# Altium PCB ChronomePCBV2_2.PcbDoc (part 2 of 2)
Units mil, origin at the board's own origin, x right, y up, seen from the top; angles counter-clockwise.
Board outline 8860 x 8860 mil, 2 copper layers (Top Layer, Bottom Layer); 151 components, 169 nets, 789 pads, 304 vias.
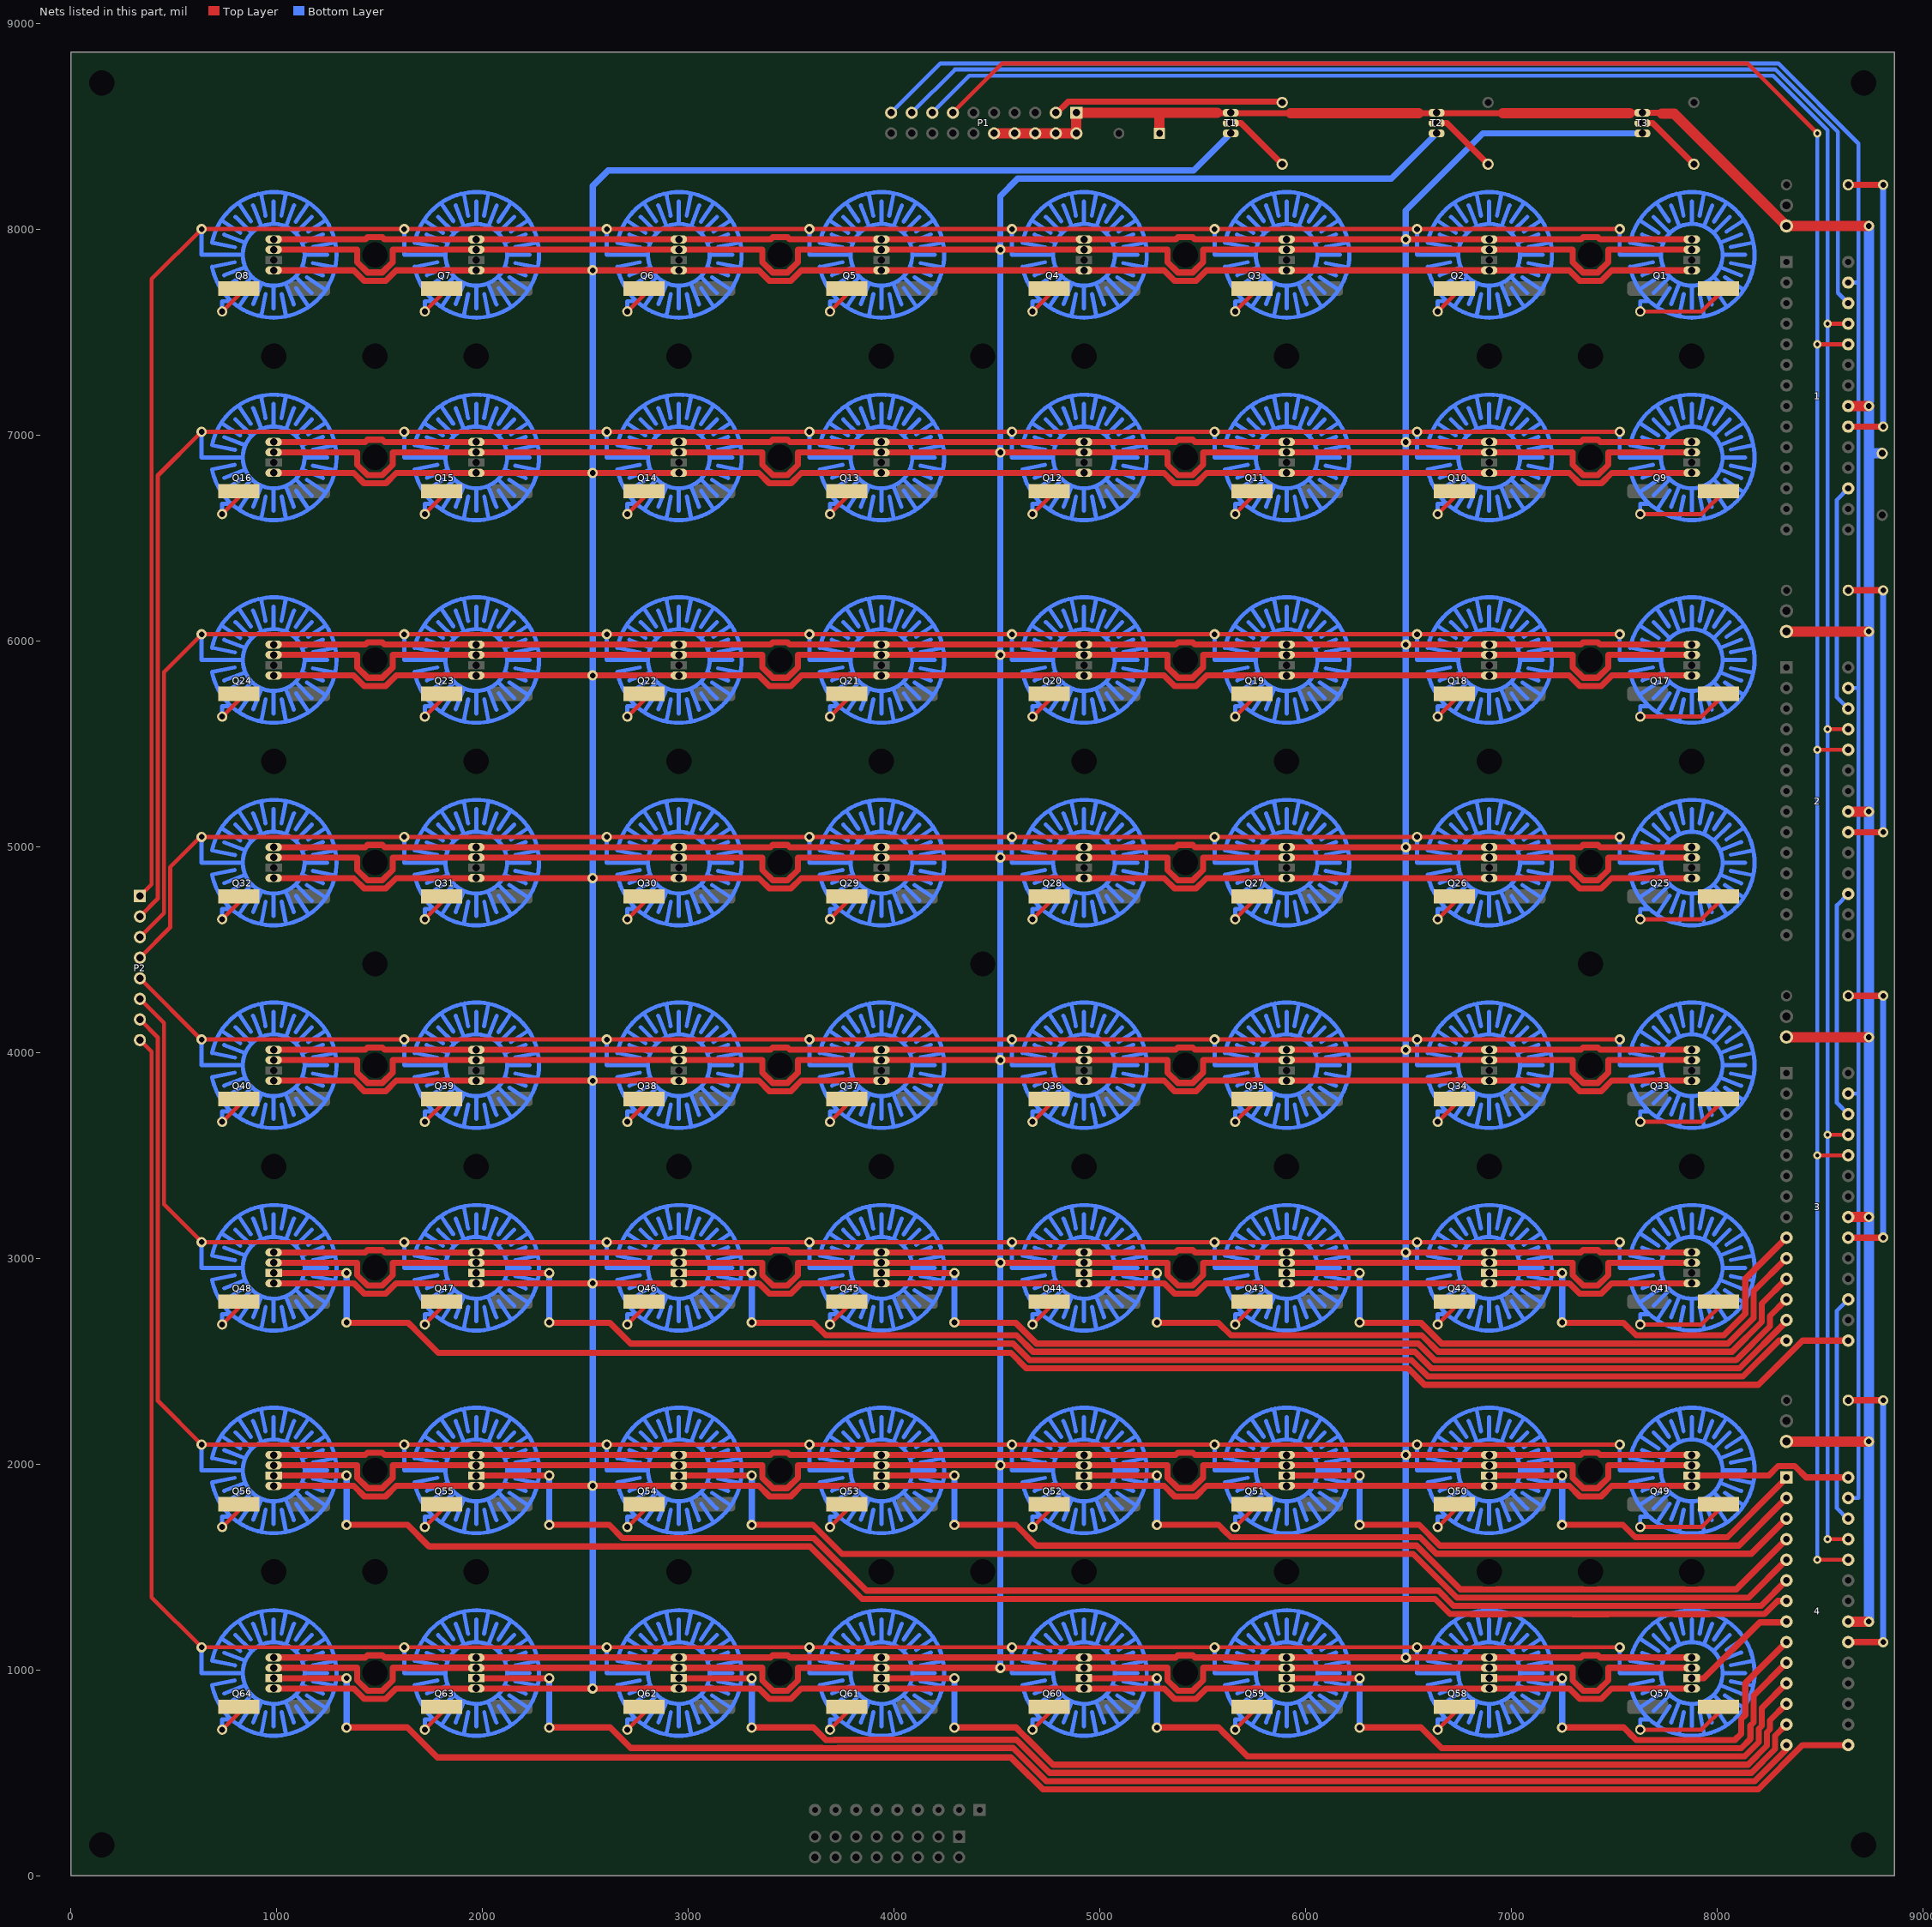
[diagram p2: the nets of this part, all layers, seen from the top]

## Via types
v1: diameter 50, hole 28, Top Layer to Bottom Layer, 284 vias
v2: diameter 40, hole 20, Top Layer to Bottom Layer, 20 vias

## Nets (pads, with @x,y where several pads share a name; then routed paths per layer and width w, separated by ;. In a path a pad name is that pad's centre, name@x,y a point inside that pad or via, vN(x,y) a via of type N, cw(c..) or ccw(c..) an arc to the next point about the centre after c; other vN are vias at no path point) (continued)
"LED GND 42": 3.9 Q42.1 | length 2005.3
  Top Layer w30: Q42.1@6890.63,2928.62 v1(7245.12,2928.62) ; v1@7245.12,2685.87 7543.93,2685.87 7604.17,2625.63 8030.63,2625.63 8135.12,2730.12 8135.12,2900.12 3.9@8335.12,3100.12
  Bottom Layer w30: v1(7245.12,2688.86) v1(7245.12,2928.62)
"LED GND 43": 3.10 Q43.1 | length 2957.9
  Top Layer w30: Q43.1@5906.38,2928.62 v1(6260.87,2928.62) ; v1@6260.87,2685.87 6559.68,2685.87 6659.92,2585.63 8050.63,2585.63 8175.12,2710.12 8175.12,2840.12 3.10@8335.12,3000.12
  Bottom Layer w30: v1(6260.87,2688.86) v1(6260.87,2928.62)
"LED GND 44": 3.11 Q44.1 | length 3910.4
  Top Layer w30: Q44.1@4922.13,2928.62 v1(5276.61,2928.62) ; v1@5276.61,2685.87 5575.43,2685.87 5635.67,2625.63 6563.35,2625.63 6643.35,2545.63 8070.63,2545.63 8215.12,2690.12 8215.12,2780.12 3.11@8335.12,2900.12
  Bottom Layer w30: v1(5276.61,2688.86) v1(5276.61,2928.62)
"LED GND 45": 3.12 Q45.1 | length 4862.9
  Top Layer w30: Q45.1@3937.87,2928.62 v1(4292.36,2928.62) ; v1@4292.36,2685.87 4591.18,2685.87 4691.42,2585.63 6546.78,2585.63 6626.78,2505.63 8090.63,2505.63 8255.12,2670.12 8255.12,2720.12 3.12@8335.12,2800.12
  Bottom Layer w30: v1(4292.36,2688.86) v1(4292.36,2928.62)
"LED GND 46": 3.13 Q46.1 | length 5813.5
  Top Layer w30: Q46.1@2953.62,2928.62 v1(3308.11,2928.62) ; v1@3308.11,2685.87 3606.93,2685.87 3667.16,2625.63 4594.85,2625.63 4674.85,2545.63 6530.21,2545.63 6610.21,2465.63 8107.2,2465.63 8335.12,2693.55 3.13@8335.12,2700.12
  Bottom Layer w30: v1(3308.11,2688.86) v1(3308.11,2928.62)
"LED GND 47": 3.14 Q47.1 | length 6785.6
  Top Layer w30: Q47.1@1969.37,2928.62 v1(2323.86,2928.62) ; v1@2323.86,2685.87 2619.37,2685.87 2719.61,2585.63 4578.28,2585.63 4658.28,2505.63 6513.65,2505.63 6593.65,2425.63 8123.77,2425.63 8298.26,2600.12 3.14@8335.12,2600.12
  Bottom Layer w30: v1(2323.86,2688.86) v1(2323.86,2928.62)
"LED GND 48": 3.15 Q48.1 | length 8102.6
  Top Layer w30: Q48.1@985.12,2928.62 v1(1339.61,2928.62) ; v1@1339.61,2685.87 1639.37,2685.87 1669.37,2655.87 ; 1669.37,2654.92 1784.17,2540.12 4567.22,2540.12 4641.71,2465.63 6497.08,2465.63 6577.08,2385.63 8198.41,2385.63 8412.9,2600.12 3.15@8635.12,2600.12
  Bottom Layer w30: v1(1339.61,2688.86) v1(1339.61,2928.62)
"LED GND 49": 4.28 Q49.1 | length 801.8
  Top Layer w30: Q49.1@7874.88,1944.88 8249.53,1944.88 8294.76,1990.12 8375.47,1990.12 8430.47,1935.12 4.28@8635.12,1935.12
"LED GND 50": 4.1 Q50.1 | length 1828.9
  Top Layer w30: Q50.1@6890.63,1944.37 v1(7245.12,1944.37) ; v1@7245.12,1705.12 7540.12,1705.12 7600.87,1644.37 8047.99,1644.37 8173.88,1770.27 8173.88,1770.78 4.1@8335.12,1932.01
  Bottom Layer w30: v1(7245.12,1704.61) v1(7245.12,1944.37)
"LED GND 51": 4.2 Q51.1 | length 2805.8
  Top Layer w30: Q51.1@5906.38,1944.37 v1(6260.87,1944.37) ; v1@6260.87,1705.12 6550.12,1705.12 6650.87,1604.37 8104.37,1604.37 4.2@8335.12,1835.12
  Bottom Layer w30: v1(6260.87,1704.61) v1(6260.87,1944.37)
"LED GND 52": 4.3 Q52.1 | length 3782.1
  Top Layer w30: Q52.1@4922.13,1944.37 v1(5276.61,1944.37) ; v1@5276.61,1705.12 5575.43,1705.12 5606.38,1674.17 5606.38,1673.66 5635.67,1644.37 6554.3,1644.37 6634.3,1564.37 8164.37,1564.37 4.3@8335.12,1735.12
  Bottom Layer w30: v1(5276.61,1704.61) v1(5276.61,1944.37)
"LED GND 53": 4.4 Q53.1 | length 4868.8
  Top Layer w30: Q53.1@3937.87,1944.37 v1(4292.36,1944.37) ; v1@4292.36,1705.12 4590.12,1705.12 4690.87,1604.37 6537.73,1604.37 6750.49,1391.61 6854.49,1391.61 6855,1391.09 6926.26,1391.09 6926.77,1391.61 7346.74,1391.61 7347.12,1391.22 7418.39,1391.22 7418.77,1391.61 7838.86,1391.61 7839.25,1391.22 7910.51,1391.22 7910.9,1391.61 8091.61,1391.61 4.4@8335.12,1635.12
  Bottom Layer w30: v1(4292.36,1704.61) v1(4292.36,1944.37)
"LED GND 54": 4.5 Q54.1 | length 5844.8
  Top Layer w30: Q54.1@2953.62,1944.37 v1(3308.11,1944.37) ; v1@3308.11,1705.12 3605.12,1705.12 3746.46,1563.78 6521.75,1563.78 6733.92,1351.61 6837.92,1351.61 6838.43,1351.09 6942.83,1351.09 6943.34,1351.61 7330.17,1351.61 7330.56,1351.22 7434.96,1351.22 7435.34,1351.61 7822.3,1351.61 7822.68,1351.22 7927.08,1351.22 7927.47,1351.61 8151.61,1351.61 4.5@8335.12,1535.12
  Bottom Layer w30: v1(3308.11,1704.61) v1(3308.11,1944.37)
"LED GND 55": 4.6 Q55.1 | length 6820.7
  Top Layer w30: Q55.1@1969.37,1944.37 v1(2323.86,1944.37) ; v1@2323.86,1705.12 2615.12,1705.12 2680.12,1640.12 3610.12,1640.12 3865.12,1385.12 6643.84,1385.12 6717.36,1311.61 6821.35,1311.61 6821.86,1311.09 6959.4,1311.09 6959.91,1311.61 7313.6,1311.61 7313.99,1311.22 7451.53,1311.22 7451.91,1311.61 7805.73,1311.61 7806.11,1311.22 7943.65,1311.22 7944.04,1311.61 8211.61,1311.61 4.6@8335.12,1435.12
  Bottom Layer w30: v1(2323.86,1704.61) v1(2323.86,1944.37)
"LED GND 56": 4.7 Q56.1 | length 7796.7
  Top Layer w30: Q56.1@985.12,1944.37 v1(1339.61,1944.37) ; v1@1339.61,1705.12 1635.12,1705.12 1740.12,1600.12 3590.12,1600.12 3845.12,1345.12 6627.28,1345.12 6700.79,1271.61 6708.63,1271.61 6804.78,1271.61 6805.29,1271.09 6975.97,1271.09 6976.48,1271.61 7297.03,1271.61 7297.42,1271.22 7468.09,1271.22 7468.48,1271.61 7789.16,1271.61 7789.54,1271.22 7960.22,1271.22 7960.61,1271.61 8228.17,1271.61 8291.69,1335.12 4.7@8335.12,1335.12
  Bottom Layer w30: v1(1339.61,1704.61) v1(1339.61,1944.37)
"LED GND 57": 4.8 Q57.1 | length 569.2
  Top Layer w30: Q57.1@7874.88,960.12 7934.37,960.12 8205.86,1231.61 4.8@8331.61,1231.61
"LED GND 58": 4.9 Q58.1 | length 2038.5
  Top Layer w30: Q58.1@6890.63,960.12 v1(7245.12,960.12) ; v1@7245.12,720.87 7544.37,720.87 7574.88,690.35 7574.88,689.41 7604.17,660.12 8085.12,660.12 8115.12,690.12 8115.12,761.76 8135.12,781.76 8135.12,935.12 4.9@8335.12,1135.12
  Bottom Layer w30: v1(7245.12,720.35) v1(7245.12,960.12)
"LED GND 59": 4.10 Q59.1 | length 2996.3
  Top Layer w30: Q59.1@5906.38,960.12 v1(6260.87,960.12) ; v1@6260.87,720.87 6559.17,720.87 6659.92,620.12 8115.06,620.12 8160.12,665.18 8160.12,729.82 8175.12,744.82 8175.12,875.12 4.10@8335.12,1035.12
  Bottom Layer w30: v1(6260.87,720.35) v1(6260.87,960.12)
"LED GND 60": 4.11 Q60.1 | length 3947.2
  Top Layer w30: Q60.1@4922.13,960.12 v1(5276.61,960.12) ; v1@5276.61,720.87 5575.43,720.87 5606.38,689.92 5606.38,689.41 5635.67,660.12 5636.18,660.12 5716.18,580.12 8131.63,580.12 8200.12,648.61 8200.12,713.25 8215.12,728.25 8215.12,815.12 4.11@8335.12,935.12
  Bottom Layer w30: v1(5276.61,720.35) v1(5276.61,960.12)
"LED GND 61": 4.12 Q61.1 | length 4897.7
  Top Layer w30: Q61.1@3937.87,960.12 v1(4292.36,960.12) ; v1@4292.36,720.87 4591.18,720.87 4622.13,689.92 4622.13,689.41 4651.42,660.12 4651.93,660.12 4771.93,540.12 8148.19,540.12 8240.12,632.04 8240.12,696.69 8255.12,711.69 8255.12,755.12 4.12@8335.12,835.12
  Bottom Layer w30: v1(4292.36,720.35) v1(4292.36,960.12)
"LED GND 62": 4.13 Q62.1 | length 5848.6
  Top Layer w30: Q62.1@2953.62,960.12 v1(3308.11,960.12) ; v1@3308.11,720.87 3606.93,720.87 3637.87,689.92 3637.87,689.41 3667.16,660.12 3708.58,660.12 3709.1,660.63 4594.33,660.63 4634.85,620.12 4635.36,620.12 4755.36,500.12 8164.76,500.12 8280.12,615.47 8280.12,680.12 4.13@8335.12,735.12
  Bottom Layer w30: v1(3308.11,720.35) v1(3308.11,960.12)
"LED GND 63": 4.14 Q63.1 | length 6798.9
  Top Layer w30: Q63.1@1969.37,960.12 v1(2323.86,960.12) ; v1@2323.86,720.87 2619.37,720.87 2719.61,620.63 3650.08,620.63 3650.59,620.12 3725.15,620.12 3725.66,620.63 4577.77,620.63 4618.28,580.12 4618.79,580.12 4738.79,460.12 8181.33,460.12 8333.88,612.67 8333.88,615.74 8335.12,616.98 4.14@8335.12,635.12
  Bottom Layer w30: v1(2323.86,720.35) v1(2323.86,960.12)
"LED GND 64": 4.15 Q64.1 | length 8103.4
  Top Layer w30: Q64.1@985.12,960.12 v1(1339.61,960.12) ; v1@1339.61,720.87 1395.12,720.87 1634.37,720.87 1780.12,575.12 4566.71,575.12 4601.71,540.12 4602.22,540.12 4722.22,420.12 8197.9,420.12 8412.9,635.12 4.15@8635.12,635.12
  Bottom Layer w30: v1(1339.61,720.35) v1(1339.61,960.12)
Net1_17: 1.17 2.26 | length 1115.6
  Bottom Layer w20: 2.26@8635.12,5670.12 8580.12,5725.12 8580.12,6685.12 1.17@8635.12,6740.12
Net1_20: 1.20 R4.1 | length 1515
  Top Layer w30: 1.20@8635.12,7040.12 v1(8805.12,7040.12) ; R4.1@8635.12,8215.12 v1(8805.12,8215.12)
  Bottom Layer w30: v1(8805.12,7040.12) v1(8805.12,8215.12)
Net2_17: 2.17 3.26 | length 1115.6
  Bottom Layer w20: 3.26@8635.12,3700.12 8580.12,3755.12 8580.12,4715.12 2.17@8635.12,4770.12
Net2_20: 2.20 R5.1 | length 1515
  Top Layer w30: 2.20@8635.12,5070.12 v1(8805.12,5070.12) ; R5.1@8635.12,6245.12 v1(8805.12,6245.12)
  Bottom Layer w30: v1(8805.12,5070.12) v1(8805.12,6245.12)
Net3_17: 3.17 4.26 | length 1115.6
  Bottom Layer w20: 4.26@8635.12,1730.12 8580.12,1785.12 8580.12,2745.12 3.17@8635.12,2800.12
Net3_20: 3.20 R6.1 | length 1515
  Top Layer w30: 3.20@8635.12,3100.12 v1(8805.12,3100.12) ; R6.1@8635.12,4275.12 v1(8805.12,4275.12)
  Bottom Layer w30: v1(8805.12,3100.12) v1(8805.12,4275.12)
Net4_20: 4.20 R7.1 | length 1515
  Top Layer w30: 4.20@8635.12,1135.12 v1(8805.12,1135.12) ; R7.1@8635.12,2310.12 v1(8805.12,2310.12)
  Bottom Layer w30: v1(8805.12,1135.12) v1(8805.12,2310.12)
NetD1_0: D1.0 Q1.Out | length 455.2
  Top Layer w20: Q1.Out@7624.88,7599.88 7923.12,7599.88 D1.0@8034.12,7710.88
NetD2_0: D2.0 Q2.Out | length 144.6
  Top Layer w20: Q2.Out@6640.63,7599.88 6721.63,7680.88 D2.0@6721.63,7710.88
NetD3_0: D3.0 Q3.Out | length 144.6
  Top Layer w20: Q3.Out@5656.38,7599.88 5737.38,7680.88 D3.0@5737.38,7710.88
NetD4_0: D4.0 Q4.Out | length 144.6
  Top Layer w20: Q4.Out@4672.13,7599.88 4753.13,7680.88 D4.0@4753.13,7710.88
NetD5_0: D5.0 Q5.Out | length 144.6
  Top Layer w20: Q5.Out@3687.87,7599.88 3768.87,7680.88 D5.0@3768.87,7710.88
NetD6_0: D6.0 Q6.Out | length 144.6
  Top Layer w20: Q6.Out@2703.62,7599.88 2784.62,7680.88 D6.0@2784.62,7710.88
NetD7_0: D7.0 Q7.Out | length 144.6
  Top Layer w20: Q7.Out@1719.37,7599.88 1800.37,7680.88 D7.0@1800.37,7710.88
NetD8_0: D8.0 Q8.Out | length 144.6
  Top Layer w20: Q8.Out@735.12,7599.88 816.12,7680.88 D8.0@816.12,7710.88
NetD9_0: D9.0 Q9.Out | length 455.2
  Top Layer w20: Q9.Out@7624.88,6615.63 7923.12,6615.63 D9.0@8034.12,6726.63
NetD10_0: D10.0 Q10.Out | length 144.6
  Top Layer w20: Q10.Out@6640.63,6615.63 6721.63,6696.63 D10.0@6721.63,6726.63
NetD11_0: D11.0 Q11.Out | length 144.6
  Top Layer w20: Q11.Out@5656.38,6615.63 5737.38,6696.63 D11.0@5737.38,6726.63
NetD12_0: D12.0 Q12.Out | length 144.6
  Top Layer w20: Q12.Out@4672.13,6615.63 4753.13,6696.63 D12.0@4753.13,6726.63
NetD13_0: D13.0 Q13.Out | length 144.6
  Top Layer w20: Q13.Out@3687.87,6615.63 3768.87,6696.63 D13.0@3768.87,6726.63
NetD14_0: D14.0 Q14.Out | length 144.6
  Top Layer w20: Q14.Out@2703.62,6615.63 2784.62,6696.63 D14.0@2784.62,6726.63
NetD15_0: D15.0 Q15.Out | length 144.6
  Top Layer w20: Q15.Out@1719.37,6615.63 1800.37,6696.63 D15.0@1800.37,6726.63
NetD16_0: D16.0 Q16.Out | length 144.6
  Top Layer w20: Q16.Out@735.12,6615.63 816.12,6696.63 D16.0@816.12,6726.63
NetD17_0: D17.0 Q17.Out | length 455.2
  Top Layer w20: Q17.Out@7624.88,5631.38 7923.12,5631.38 D17.0@8034.12,5742.38
NetD18_0: D18.0 Q18.Out | length 144.6
  Top Layer w20: Q18.Out@6640.63,5631.38 6721.63,5712.38 D18.0@6721.63,5742.38
NetD19_0: D19.0 Q19.Out | length 144.6
  Top Layer w20: Q19.Out@5656.38,5631.38 5737.38,5712.38 D19.0@5737.38,5742.38
NetD20_0: D20.0 Q20.Out | length 144.6
  Top Layer w20: Q20.Out@4672.13,5631.38 4753.13,5712.38 D20.0@4753.13,5742.38
NetD21_0: D21.0 Q21.Out | length 144.6
  Top Layer w20: Q21.Out@3687.87,5631.38 3768.87,5712.38 D21.0@3768.87,5742.38
NetD22_0: D22.0 Q22.Out | length 144.6
  Top Layer w20: Q22.Out@2703.62,5631.38 2784.62,5712.38 D22.0@2784.62,5742.38
NetD23_0: D23.0 Q23.Out | length 144.6
  Top Layer w20: Q23.Out@1719.37,5631.38 1800.37,5712.38 D23.0@1800.37,5742.38
NetD24_0: D24.0 Q24.Out | length 144.6
  Top Layer w20: Q24.Out@735.12,5631.38 816.12,5712.38 D24.0@816.12,5742.38
NetD25_0: D25.0 Q25.Out | length 455.2
  Top Layer w20: Q25.Out@7624.88,4647.13 7923.12,4647.13 D25.0@8034.12,4758.13
NetD26_0: D26.0 Q26.Out | length 144.6
  Top Layer w20: Q26.Out@6640.63,4647.13 6721.63,4728.13 D26.0@6721.63,4758.13
NetD27_0: D27.0 Q27.Out | length 144.6
  Top Layer w20: Q27.Out@5656.38,4647.13 5737.38,4728.13 D27.0@5737.38,4758.13
NetD28_0: D28.0 Q28.Out | length 144.6
  Top Layer w20: Q28.Out@4672.13,4647.13 4753.13,4728.13 D28.0@4753.13,4758.13
NetD29_0: D29.0 Q29.Out | length 144.6
  Top Layer w20: Q29.Out@3687.87,4647.13 3768.87,4728.13 D29.0@3768.87,4758.13
NetD30_0: D30.0 Q30.Out | length 144.6
  Top Layer w20: Q30.Out@2703.62,4647.13 2784.62,4728.13 D30.0@2784.62,4758.13
NetD31_0: D31.0 Q31.Out | length 144.6
  Top Layer w20: Q31.Out@1719.37,4647.13 1800.37,4728.13 D31.0@1800.37,4758.13
NetD32_0: D32.0 Q32.Out | length 144.6
  Top Layer w20: Q32.Out@735.12,4647.13 816.12,4728.13 D32.0@816.12,4758.13
NetD33_0: D33.0 Q33.Out | length 455.2
  Top Layer w20: Q33.Out@7624.88,3662.87 7923.12,3662.87 D33.0@8034.12,3773.87
NetD34_0: D34.0 Q34.Out | length 144.6
  Top Layer w20: Q34.Out@6640.63,3662.87 6721.63,3743.87 D34.0@6721.63,3773.87
NetD35_0: D35.0 Q35.Out | length 144.6
  Top Layer w20: Q35.Out@5656.38,3662.87 5737.38,3743.87 D35.0@5737.38,3773.87
NetD36_0: D36.0 Q36.Out | length 144.6
  Top Layer w20: Q36.Out@4672.13,3662.87 4753.13,3743.87 D36.0@4753.13,3773.87
NetD37_0: D37.0 Q37.Out | length 144.6
  Top Layer w20: Q37.Out@3687.87,3662.87 3768.87,3743.87 D37.0@3768.87,3773.87
NetD38_0: D38.0 Q38.Out | length 144.6
  Top Layer w20: Q38.Out@2703.62,3662.87 2784.62,3743.87 D38.0@2784.62,3773.87
NetD39_0: D39.0 Q39.Out | length 144.6
  Top Layer w20: Q39.Out@1719.37,3662.87 1800.37,3743.87 D39.0@1800.37,3773.87
NetD40_0: D40.0 Q40.Out | length 144.6
  Top Layer w20: Q40.Out@735.12,3662.87 816.12,3743.87 D40.0@816.12,3773.87
NetD41_0: D41.0 Q41.Out | length 455.2
  Top Layer w20: Q41.Out@7624.88,2678.62 7923.12,2678.62 D41.0@8034.12,2789.62
NetD42_0: D42.0 Q42.Out | length 144.6
  Top Layer w20: Q42.Out@6640.63,2678.62 6721.63,2759.62 D42.0@6721.63,2789.62
NetD43_0: D43.0 Q43.Out | length 144.6
  Top Layer w20: Q43.Out@5656.38,2678.62 5737.38,2759.62 D43.0@5737.38,2789.62
NetD44_0: D44.0 Q44.Out | length 144.6
  Top Layer w20: Q44.Out@4672.13,2678.62 4753.13,2759.62 D44.0@4753.13,2789.62
NetD45_0: D45.0 Q45.Out | length 144.6
  Top Layer w20: Q45.Out@3687.87,2678.62 3768.87,2759.62 D45.0@3768.87,2789.62
NetD46_0: D46.0 Q46.Out | length 144.6
  Top Layer w20: Q46.Out@2703.62,2678.62 2784.62,2759.62 D46.0@2784.62,2789.62
NetD47_0: D47.0 Q47.Out | length 144.6
  Top Layer w20: Q47.Out@1719.37,2678.62 1800.37,2759.62 D47.0@1800.37,2789.62
NetD48_0: D48.0 Q48.Out | length 144.6
  Top Layer w20: Q48.Out@735.12,2678.62 816.12,2759.62 D48.0@816.12,2789.62
NetD49_0: D49.0 Q49.Out | length 455.2
  Top Layer w20: Q49.Out@7624.88,1694.37 7923.12,1694.37 D49.0@8034.12,1805.37
NetD50_0: D50.0 Q50.Out | length 144.6
  Top Layer w20: Q50.Out@6640.63,1694.37 6721.63,1775.37 D50.0@6721.63,1805.37
NetD51_0: D51.0 Q51.Out | length 144.6
  Top Layer w20: Q51.Out@5656.38,1694.37 5737.38,1775.37 D51.0@5737.38,1805.37
NetD52_0: D52.0 Q52.Out | length 144.6
  Top Layer w20: Q52.Out@4672.13,1694.37 4753.13,1775.37 D52.0@4753.13,1805.37
NetD53_0: D53.0 Q53.Out | length 144.6
  Top Layer w20: Q53.Out@3687.87,1694.37 3768.87,1775.37 D53.0@3768.87,1805.37
NetD54_0: D54.0 Q54.Out | length 144.6
  Top Layer w20: Q54.Out@2703.62,1694.37 2784.62,1775.37 D54.0@2784.62,1805.37
NetD55_0: D55.0 Q55.Out | length 144.6
  Top Layer w20: Q55.Out@1719.37,1694.37 1800.37,1775.37 D55.0@1800.37,1805.37
NetD56_0: D56.0 Q56.Out | length 144.6
  Top Layer w20: Q56.Out@735.12,1694.37 816.12,1775.37 D56.0@816.12,1805.37
NetD57_0: pad.0@8004.12,821.12 Q57.Out | length 455.2
  Top Layer w20: Q57.Out@7624.88,710.12 7923.12,710.12 pad.0@8034.12,821.12
NetD58_0: D58.0 Q58.Out | length 144.6
  Top Layer w20: Q58.Out@6640.63,710.12 6721.63,791.12 D58.0@6721.63,821.12
NetD59_0: D59.0 Q59.Out | length 144.6
  Top Layer w20: Q59.Out@5656.38,710.12 5737.38,791.12 D59.0@5737.38,821.12
NetD60_0: D60.0 Q60.Out | length 144.6
  Top Layer w20: Q60.Out@4672.13,710.12 4753.13,791.12 D60.0@4753.13,821.12
NetD61_0: D61.0 Q61.Out | length 144.6
  Top Layer w20: Q61.Out@3687.87,710.12 3768.87,791.12 D61.0@3768.87,821.12
NetD62_0: D62.0 Q62.Out | length 144.6
  Top Layer w20: Q62.Out@2703.62,710.12 2784.62,791.12 D62.0@2784.62,821.12
NetD63_0: D63.0 Q63.Out | length 144.6
  Top Layer w20: Q63.Out@1719.37,710.12 1800.37,791.12 D63.0@1800.37,821.12
NetD64_0: D64.0 Q64.Out | length 144.6
  Top Layer w20: Q64.Out@735.12,710.12 816.12,791.12 D64.0@816.12,821.12
NetP2_1: P2.1 Q1.In Q2.In Q3.In Q4.In Q5.In Q6.In Q7.In Q8.In | length 10253.8
  Top Layer w20: P2.1@335.12,4760.12 392.12,4817.12 392.12,7756.88 v1(635.12,7999.88) v1(1619.37,7999.88) v1(2603.62,7999.88) v1(3587.87,7999.88) v1(4572.13,7999.88) v1(5556.38,7999.88) v1(6540.63,7999.88) v1(7524.88,7999.88)
NetP2_2: P2.2 Q9.In Q10.In Q11.In Q12.In Q13.In Q14.In Q15.In Q16.In | length 9369.5
  Top Layer w20: P2.2@335.12,4660.12 422.12,4747.12 422.12,6802.63 v1(635.12,7015.63) v1(1619.37,7015.63) v1(2603.62,7015.63) v1(3587.87,7015.63) v1(4572.13,7015.63) v1(5556.38,7015.63) v1(6540.63,7015.63) v1(7524.88,7015.63)
NetP2_3: P2.3 Q17.In Q18.In Q19.In Q20.In Q21.In Q22.In Q23.In Q24.In | length 8485.3
  Top Layer w20: P2.3@335.12,4560.12 452.12,4677.12 452.12,5848.38 v1(635.12,6031.38) v1(1619.37,6031.38) v1(2603.62,6031.38) v1(3587.87,6031.38) v1(4572.13,6031.38) v1(5556.38,6031.38) v1(6540.63,6031.38) v1(7524.88,6031.38)
NetP2_4: P2.4 Q25.In Q26.In Q27.In Q28.In Q29.In Q30.In Q31.In Q32.In | length 7604.5
  Top Layer w20: P2.4@335.12,4460.12 482.12,4607.12 482.12,4900.12 629.13,5047.13 v1(1619.37,5047.13) v1(2603.62,5047.13) v1(3587.87,5047.13) v1(4572.13,5047.13) v1(5556.38,5047.13) v1(6540.63,5047.13) v1(7524.88,5047.13)
  other v1: 635.12,5047.13
NetP2_5: P2.5 Q33.In Q34.In Q35.In Q36.In Q37.In Q38.In Q39.In Q40.In | length 7312.9
  Top Layer w20: P2.5@335.12,4360.12 632.36,4062.87 v1(1619.37,4062.87) v1(2603.62,4062.87) v1(3587.87,4062.87) v1(4572.13,4062.87) v1(5556.38,4062.87) v1(6540.63,4062.87) v1(7524.88,4062.87)
  other v1: 635.12,4062.87
NetP2_6: P2.6 Q41.In Q42.In Q43.In Q44.In Q45.In Q46.In Q47.In Q48.In | length 8195.5
  Top Layer w20: P2.6@335.12,4260.12 452.12,4143.12 452.12,3261.62 v1(635.12,3078.62) v1(1619.37,3078.62) v1(2603.62,3078.62) v1(3587.87,3078.62) v1(4572.13,3078.62) v1(5556.38,3078.62) v1(6540.63,3078.62) v1(7524.88,3078.62)
NetP2_7: P2.7 Q49.In Q50.In Q51.In Q52.In Q53.In Q54.In Q55.In Q56.In | length 9079.8
  Top Layer w20: P2.7@335.12,4160.12 422.12,4073.12 422.12,2307.37 v1(635.12,2094.37) v1(1619.37,2094.37) v1(2603.62,2094.37) v1(3587.87,2094.37) v1(4572.13,2094.37) v1(5556.38,2094.37) v1(6540.63,2094.37) v1(7524.88,2094.37)
NetP2_8: P2.8 Q57.In Q58.In Q59.In Q60.In Q61.In Q62.In Q63.In Q64.In | length 9964
  Top Layer w20: P2.8@335.12,4060.12 392.12,4003.12 392.12,1353.12 v1(635.12,1110.12) v1(1619.37,1110.12) v1(2603.62,1110.12) v1(3587.87,1110.12) v1(4572.13,1110.12) v1(5556.38,1110.12) v1(6540.63,1110.12) v1(7524.88,1110.12)
NetQ1_0: Q1.0 Q2.0 Q3.0 Q4.0 Q5.0 Q6.0 Q7.0 Q8.0 Q9.0 Q10.0 Q11.0 Q12.0 Q13.0 Q14.0 Q15.0 Q16.0 Q17.0 Q18.0 Q19.0 Q20.0 Q21.0 Q22.0 Q23.0 Q24.0 Q25.0 Q26.0 Q27.0 Q28.0 Q29.0 Q30.0 Q31.0 Q32.0 Q33.0 Q34.0 Q35.0 Q36.0 Q37.0 Q38.0 Q39.0 Q40.0 Q41.0 Q42.0 Q43.0 Q44.0 Q45.0 Q46.0 Q47.0 Q48.0 Q49.0 Q50.0 Q51.0 Q52.0 Q53.0 Q54.0 Q55.0 Q56.0 Q57.0 Q58.0 Q59.0 Q60.0 Q61.0 Q62.0 Q63.0 Q64.0 T1.3 | length 66976.4
  Top Layer w30: Q64.0@985.12,910.12 1374.02,910.12 1425.04,859.09 1529.44,859.09 1580.47,910.12 Q63.0@1969.37,910.12 Q62.0@2953.62,910.12 3342.52,910.12 3393.55,859.09 3497.95,859.09 3548.97,910.12 Q61.0@3937.87,910.12 Q60.0@4922.13,910.12 5311.03,910.12 5362.05,859.09 5466.45,859.09 5517.48,910.12 Q59.0@5906.38,910.12 Q58.0@6890.63,910.12 7279.53,910.12 7330.56,859.09 7434.96,859.09 7485.98,910.12 Q57.0@7874.88,910.12 ; Q56.0@985.12,1894.37 1374.02,1894.37 1425.04,1843.35 1529.44,1843.35 1580.47,1894.37 Q55.0@1969.37,1894.37 Q54.0@2953.62,1894.37 3342.52,1894.37 3393.55,1843.35 3497.95,1843.35 3548.97,1894.37 Q53.0@3937.87,1894.37 Q52.0@4922.13,1894.37 5311.03,1894.37 5362.05,1843.35 5466.45,1843.35 5517.48,1894.37 Q51.0@5906.38,1894.37 Q50.0@6890.63,1894.37 7279.53,1894.37 7330.56,1843.35 7434.96,1843.35 7485.98,1894.37 Q49.0@7874.88,1894.37 ; Q48.0@985.12,2878.62 1374.02,2878.62 1425.04,2827.6 1529.44,2827.6 1580.47,2878.62 Q47.0@1969.37,2878.62 Q46.0@2953.62,2878.62 3342.52,2878.62 3393.55,2827.6 3497.95,2827.6 3548.97,2878.62 Q45.0@3937.87,2878.62 Q44.0@4922.13,2878.62 5311.03,2878.62 5362.05,2827.6 5466.45,2827.6 5517.48,2878.62 Q43.0@5906.38,2878.62 Q42.0@6890.63,2878.62 7279.53,2878.62 7330.56,2827.6 7434.96,2827.6 7485.98,2878.62 Q41.0@7874.88,2878.62 ; Q40.0@985.12,3862.87 1374.02,3862.87 1425.04,3811.85 1529.44,3811.85 1580.47,3862.87 Q39.0@1969.37,3862.87 Q38.0@2953.62,3862.87 3342.52,3862.87 3393.55,3811.85 3497.95,3811.85 3548.97,3862.87 Q37.0@3937.87,3862.87 Q36.0@4922.13,3862.87 5311.03,3862.87 5362.05,3811.85 5466.45,3811.85 5517.48,3862.87 Q35.0@5906.38,3862.87 Q34.0@6890.63,3862.87 7279.53,3862.87 7330.56,3811.85 7434.96,3811.85 7485.98,3862.87 Q33.0@7874.88,3862.87 ; Q32.0@985.12,4847.13 1374.02,4847.13 1425.04,4796.1 1529.44,4796.1 1580.47,4847.13 Q31.0@1969.37,4847.13 Q30.0@2953.62,4847.13 3342.52,4847.13 3393.55,4796.1 3497.95,4796.1 3548.97,4847.13 Q29.0@3937.87,4847.13 Q28.0@4922.13,4847.13 5311.03,4847.13 5362.05,4796.1 5466.45,4796.1 5517.48,4847.13 Q27.0@5906.38,4847.13 Q26.0@6890.63,4847.13 7279.53,4847.13 7330.56,4796.1 7434.96,4796.1 7485.98,4847.13 Q25.0@7874.88,4847.13 ; Q24.0@985.12,5831.38 1374.02,5831.38 1425.04,5780.35 1529.44,5780.35 1580.47,5831.38 Q23.0@1969.37,5831.38 Q22.0@2953.62,5831.38 3342.52,5831.38 3393.55,5780.35 3497.95,5780.35 3548.97,5831.38 Q21.0@3937.87,5831.38 Q20.0@4922.13,5831.38 5311.03,5831.38 5362.05,5780.35 5466.45,5780.35 5517.48,5831.38 Q19.0@5906.38,5831.38 Q18.0@6890.63,5831.38 7279.53,5831.38 7330.56,5780.35 7434.96,5780.35 7485.98,5831.38 Q17.0@7874.88,5831.38 ; Q16.0@985.12,6815.63 1374.02,6815.63 1425.04,6764.61 1529.44,6764.61 1580.47,6815.63 Q15.0@1969.37,6815.63 Q14.0@2953.62,6815.63 3342.52,6815.63 3393.55,6764.61 3497.95,6764.61 3548.97,6815.63 Q13.0@3937.87,6815.63 Q12.0@4922.13,6815.63 5311.03,6815.63 5362.05,6764.61 5466.45,6764.61 5517.48,6815.63 Q11.0@5906.38,6815.63 Q10.0@6890.63,6815.63 7279.53,6815.63 7330.56,6764.61 7434.96,6764.61 7485.98,6815.63 Q9.0@7874.88,6815.63 ; Q8.0@985.12,7799.88 1374.02,7799.88 1425.04,7748.86 1529.44,7748.86 1580.47,7799.88 Q7.0@1969.37,7799.88 Q6.0@2953.62,7799.88 3342.52,7799.88 3393.55,7748.86 3497.95,7748.86 3548.97,7799.88 Q5.0@3937.87,7799.88 Q4.0@4922.13,7799.88 5311.03,7799.88 5362.05,7748.86 5466.45,7748.86 5517.48,7799.88 Q3.0@5906.38,7799.88 Q2.0@6890.63,7799.88 7279.53,7799.88 7330.56,7748.86 7434.96,7748.86 7485.98,7799.88 Q1.0@7874.88,7799.88
  Bottom Layer w30: v1(2535.12,910.12) 2535.12,8210.12 2610.12,8285.12 5455.12,8285.12 T1.3@5635.12,8465.12
  other v1: 2535.12,1894.37 2535.12,2878.62 2535.12,3862.87 2535.12,4847.13 2535.12,5831.38 2535.12,6815.63 2535.12,7799.88
NetQ1_2: Q1.2 Q2.2 Q3.2 Q4.2 Q5.2 Q6.2 Q7.2 Q8.2 Q9.2 Q10.2 Q11.2 Q12.2 Q13.2 Q14.2 Q15.2 Q16.2 Q17.2 Q18.2 Q19.2 Q20.2 Q21.2 Q22.2 Q23.2 Q24.2 Q25.2 Q26.2 Q27.2 Q28.2 Q29.2 Q30.2 Q31.2 Q32.2 Q33.2 Q34.2 Q35.2 Q36.2 Q37.2 Q38.2 Q39.2 Q40.2 Q41.2 Q42.2 Q43.2 Q44.2 Q45.2 Q46.2 Q47.2 Q48.2 Q49.2 Q50.2 Q51.2 Q52.2 Q53.2 Q54.2 Q55.2 Q56.2 Q57.2 Q58.2 Q59.2 Q60.2 Q61.2 Q62.2 Q63.2 Q64.2 T2.3 | length 69729.9
  Top Layer w30: Q64.2@985.12,1010.12 1391.22,1010.12 1391.22,949.49 1441.61,899.09 1512.88,899.09 1563.27,949.49 1563.27,1010.12 Q63.2@1969.37,1010.12 Q62.2@2953.62,1010.12 3359.72,1010.12 3359.72,949.49 3410.12,899.09 3481.38,899.09 3531.77,949.49 3531.77,1010.12 Q61.2@3937.87,1010.12 Q60.2@4922.13,1010.12 5328.23,1010.12 5328.23,949.49 5378.62,899.09 5449.88,899.09 5500.28,949.49 5500.28,1010.12 Q59.2@5906.38,1010.12 Q58.2@6890.63,1010.12 7296.73,1010.12 7296.73,949.49 7347.12,899.09 7418.39,899.09 7468.78,949.49 7468.78,1010.12 Q57.2@7874.88,1010.12 ; Q56.2@985.12,1994.37 1391.22,1994.37 1391.22,1933.74 1441.61,1883.35 1512.88,1883.35 1563.27,1933.74 1563.27,1994.37 Q55.2@1969.37,1994.37 Q54.2@2953.62,1994.37 3359.72,1994.37 3359.72,1933.74 3410.12,1883.35 3481.38,1883.35 3531.77,1933.74 3531.77,1994.37 Q53.2@3937.87,1994.37 Q52.2@4922.13,1994.37 5328.23,1994.37 5328.23,1933.74 5378.62,1883.35 5449.88,1883.35 5500.28,1933.74 5500.28,1994.37 Q51.2@5906.38,1994.37 Q50.2@6890.63,1994.37 7296.73,1994.37 7296.73,1933.74 7347.12,1883.35 7418.39,1883.35 7468.78,1933.74 7468.78,1994.37 Q49.2@7874.88,1994.37 ; Q48.2@985.12,2978.62 1391.22,2978.62 1391.22,2917.99 1441.61,2867.6 1512.88,2867.6 1563.27,2917.99 1563.27,2978.62 Q47.2@1969.37,2978.62 Q46.2@2953.62,2978.62 3359.72,2978.62 3359.72,2917.99 3410.12,2867.6 3481.38,2867.6 3531.77,2917.99 3531.77,2978.62 Q45.2@3937.87,2978.62 Q44.2@4922.13,2978.62 5328.23,2978.62 5328.23,2917.99 5378.62,2867.6 5449.88,2867.6 5500.28,2917.99 5500.28,2978.62 Q43.2@5906.38,2978.62 Q42.2@6890.63,2978.62 7296.73,2978.62 7296.73,2917.99 7347.12,2867.6 7418.39,2867.6 7468.78,2917.99 7468.78,2978.62 Q41.2@7874.88,2978.62 ; Q40.2@985.12,3962.87 1391.22,3962.87 1391.22,3902.24 1441.61,3851.85 1512.88,3851.85 1563.27,3902.24 1563.27,3962.87 Q39.2@1969.37,3962.87 Q38.2@2953.62,3962.87 3359.72,3962.87 3359.72,3902.24 3410.12,3851.85 3481.38,3851.85 3531.77,3902.24 3531.77,3962.87 Q37.2@3937.87,3962.87 Q36.2@4922.13,3962.87 5328.23,3962.87 5328.23,3902.24 5378.62,3851.85 5449.88,3851.85 5500.28,3902.24 5500.28,3962.87 Q35.2@5906.38,3962.87 Q34.2@6890.63,3962.87 7296.73,3962.87 7296.73,3902.24 7347.12,3851.85 7418.39,3851.85 7468.78,3902.24 7468.78,3962.87 Q33.2@7874.88,3962.87 ; Q32.2@985.12,4947.13 1391.22,4947.13 1391.22,4886.49 1441.61,4836.1 1512.88,4836.1 1563.27,4886.49 1563.27,4946.27 1564.13,4947.13 Q31.2@1969.37,4947.13 Q30.2@2953.62,4947.13 3359.72,4947.13 3359.72,4886.49 3410.12,4836.1 3481.38,4836.1 3531.77,4886.49 3531.77,4947.13 Q29.2@3937.87,4947.13 Q28.2@4922.13,4947.13 5328.23,4947.13 5328.23,4886.49 5378.62,4836.1 5449.88,4836.1 5500.28,4886.49 5500.28,4947.13 Q27.2@5906.38,4947.13 Q26.2@6890.63,4947.13 7296.73,4947.13 7296.73,4886.49 7347.12,4836.1 7418.39,4836.1 7468.78,4886.49 7468.78,4947.13 Q25.2@7874.88,4947.13 ; Q24.2@985.12,5931.38 1391.22,5931.38 1391.22,5870.75 1441.61,5820.35 1512.88,5820.35 1563.27,5870.75 1563.27,5931.38 Q23.2@1969.37,5931.38 Q22.2@2953.62,5931.38 3359.72,5931.38 3359.72,5870.75 3410.12,5820.35 3481.38,5820.35 3531.77,5870.75 3531.77,5931.38 Q21.2@3937.87,5931.38 Q20.2@4922.13,5931.38 5328.23,5931.38 5328.23,5870.75 5378.62,5820.35 5449.88,5820.35 5500.28,5870.75 5500.28,5931.38 Q19.2@5906.38,5931.38 Q18.2@6890.63,5931.38 7296.73,5931.38 7296.73,5870.75 7347.12,5820.35 7418.39,5820.35 7468.78,5870.75 7468.78,5931.38 Q17.2@7874.88,5931.38 ; Q16.2@985.12,6915.63 1391.22,6915.63 1391.22,6855 1441.61,6804.61 1512.88,6804.61 1563.27,6855 1563.27,6915.63 Q15.2@1969.37,6915.63 Q14.2@2953.62,6915.63 3359.72,6915.63 3359.72,6855 3410.12,6804.61 3481.38,6804.61 3531.77,6855 3531.77,6915.63 Q13.2@3937.87,6915.63 Q12.2@4922.13,6915.63 5328.23,6915.63 5328.23,6855 5378.62,6804.61 5449.88,6804.61 5500.28,6855 5500.28,6915.63 Q11.2@5906.38,6915.63 Q10.2@6890.63,6915.63 7296.73,6915.63 7296.73,6855 7347.12,6804.61 7418.39,6804.61 7468.78,6855 7468.78,6915.63 Q9.2@7874.88,6915.63 ; Q8.2@985.12,7899.88 1391.22,7899.88 1391.22,7839.25 1441.61,7788.86 1512.88,7788.86 1563.27,7839.25 1563.27,7899.88 Q7.2@1969.37,7899.88 Q6.2@2953.62,7899.88 3359.72,7899.88 3359.72,7839.25 3410.12,7788.86 3481.38,7788.86 3531.77,7839.25 3531.77,7899.88 Q5.2@3937.87,7899.88 Q4.2@4922.13,7899.88 5328.23,7899.88 5328.23,7839.25 5378.62,7788.86 5449.88,7788.86 5500.28,7839.25 5500.28,7899.88 Q3.2@5906.38,7899.88 Q2.2@6890.63,7899.88 7296.73,7899.88 7296.73,7839.25 7347.12,7788.86 7418.39,7788.86 7468.78,7839.25 7468.78,7899.88 Q1.2@7874.88,7899.88
  Bottom Layer w30: v1(4516.02,1010.12) 4516.02,8161.02 4600.12,8245.12 6415.12,8245.12 T2.3@6635.12,8465.12
  other v1: 4516.02,1994.37 4516.02,2978.62 4516.02,3962.87 4516.02,4947.13 4516.02,5931.38 4516.02,6915.63 4516.02,7899.88
NetQ1_3: Q1.3 Q2.3 Q3.3 Q4.3 Q5.3 Q6.3 Q7.3 Q8.3 Q9.3 Q10.3 Q11.3 Q12.3 Q13.3 Q14.3 Q15.3 Q16.3 Q17.3 Q18.3 Q19.3 Q20.3 Q21.3 Q22.3 Q23.3 Q24.3 Q25.3 Q26.3 Q27.3 Q28.3 Q29.3 Q30.3 Q31.3 Q32.3 Q33.3 Q34.3 Q35.3 Q36.3 Q37.3 Q38.3 Q39.3 Q40.3 Q41.3 Q42.3 Q43.3 Q44.3 Q45.3 Q46.3 Q47.3 Q48.3 Q49.3 Q50.3 Q51.3 Q52.3 Q53.3 Q54.3 Q55.3 Q56.3 Q57.3 Q58.3 Q59.3 Q60.3 Q61.3 Q62.3 Q63.3 Q64.3 T3.3 | length 63745.7
  Top Layer w30: Q64.3@985.12,1060.12 1430.59,1060.12 1441.61,1071.14 1512.88,1071.14 1523.9,1060.12 Q63.3@1969.37,1060.12 Q62.3@2953.62,1060.12 3399.09,1060.12 3410.12,1071.14 3481.38,1071.14 3492.4,1060.12 Q61.3@3937.87,1060.12 Q60.3@4922.13,1060.12 5367.6,1060.12 5378.62,1071.14 5449.88,1071.14 5460.91,1060.12 Q59.3@5906.38,1060.12 Q58.3@6890.63,1060.12 7336.1,1060.12 7347.12,1071.14 7418.39,1071.14 7429.41,1060.12 Q57.3@7874.88,1060.12 ; Q56.3@985.12,2044.37 1430.59,2044.37 1441.61,2055.39 1512.88,2055.39 1523.9,2044.37 Q55.3@1969.37,2044.37 Q54.3@2953.62,2044.37 3399.09,2044.37 3410.12,2055.39 3481.38,2055.39 3492.4,2044.37 Q53.3@3937.87,2044.37 Q52.3@4922.13,2044.37 5367.6,2044.37 5378.62,2055.39 5449.88,2055.39 5460.91,2044.37 Q51.3@5906.38,2044.37 Q50.3@6890.63,2044.37 7336.1,2044.37 7347.12,2055.39 7418.39,2055.39 7429.41,2044.37 Q49.3@7874.88,2044.37 ; Q48.3@985.12,3028.62 1430.59,3028.62 1441.61,3039.65 1512.88,3039.65 1523.9,3028.62 Q47.3@1969.37,3028.62 Q46.3@2953.62,3028.62 3399.09,3028.62 3410.12,3039.65 3481.38,3039.65 3492.4,3028.62 Q45.3@3937.87,3028.62 Q44.3@4922.13,3028.62 5367.6,3028.62 5378.62,3039.65 5449.88,3039.65 5460.91,3028.62 Q43.3@5906.38,3028.62 Q42.3@6890.63,3028.62 7336.1,3028.62 7347.12,3039.65 7418.39,3039.65 7429.41,3028.62 Q41.3@7874.88,3028.62 ; Q40.3@985.12,4012.87 1430.59,4012.87 1441.61,4023.9 1512.88,4023.9 1523.9,4012.87 Q39.3@1969.37,4012.87 Q38.3@2953.62,4012.87 3399.09,4012.87 3410.12,4023.9 3481.38,4023.9 3492.4,4012.87 Q37.3@3937.87,4012.87 Q36.3@4922.13,4012.87 5367.6,4012.87 5378.62,4023.9 5449.88,4023.9 5460.91,4012.87 Q35.3@5906.38,4012.87 Q34.3@6890.63,4012.87 7336.1,4012.87 7347.12,4023.9 7418.39,4023.9 7429.41,4012.87 Q33.3@7874.88,4012.87 ; Q32.3@985.12,4997.13 1430.59,4997.13 1441.61,5008.15 1512.88,5008.15 1523.9,4997.13 Q31.3@1969.37,4997.13 Q30.3@2953.62,4997.13 3399.09,4997.13 3410.12,5008.15 3481.38,5008.15 3492.4,4997.13 Q29.3@3937.87,4997.13 Q28.3@4922.13,4997.13 5367.6,4997.13 5378.62,5008.15 5449.88,5008.15 5460.91,4997.13 Q27.3@5906.38,4997.13 Q26.3@6890.63,4997.13 7336.1,4997.13 7347.12,5008.15 7418.39,5008.15 7429.41,4997.13 Q25.3@7874.88,4997.13 ; Q24.3@985.12,5981.38 1430.59,5981.38 1441.61,5992.4 1512.88,5992.4 1523.9,5981.38 Q23.3@1969.37,5981.38 Q22.3@2953.62,5981.38 3399.09,5981.38 3410.12,5992.4 3481.38,5992.4 3492.4,5981.38 Q21.3@3937.87,5981.38 Q20.3@4922.13,5981.38 5367.6,5981.38 5378.62,5992.4 5449.88,5992.4 5460.91,5981.38 Q19.3@5906.38,5981.38 Q18.3@6890.63,5981.38 7336.1,5981.38 7347.12,5992.4 7418.39,5992.4 7429.41,5981.38 Q17.3@7874.88,5981.38 ; Q16.3@985.12,6965.63 1430.59,6965.63 1441.61,6976.65 1512.88,6976.65 1523.9,6965.63 Q15.3@1969.37,6965.63 Q14.3@2953.62,6965.63 3399.09,6965.63 3410.12,6976.65 3481.38,6976.65 3492.4,6965.63 Q13.3@3937.87,6965.63 Q12.3@4922.13,6965.63 5367.6,6965.63 5378.62,6976.65 5449.88,6976.65 5460.91,6965.63 Q11.3@5906.38,6965.63 Q10.3@6890.63,6965.63 7336.1,6965.63 7347.12,6976.65 7418.39,6976.65 7429.41,6965.63 Q9.3@7874.88,6965.63 ; Q8.3@985.12,7949.88 1430.59,7949.88 1441.61,7960.91 1512.88,7960.91 1523.9,7949.88 Q7.3@1969.37,7949.88 Q6.3@2953.62,7949.88 3399.09,7949.88 3410.12,7960.91 3481.38,7960.91 3492.4,7949.88 Q5.3@3937.87,7949.88 Q4.3@4922.13,7949.88 5367.6,7949.88 5378.62,7960.91 5449.88,7960.91 5460.91,7949.88 Q3.3@5906.38,7949.88 Q2.3@6890.63,7949.88 7336.1,7949.88 7347.12,7960.91 7418.39,7960.91 7429.41,7949.88 Q1.3@7874.88,7949.88
  Bottom Layer w30: v1(6485.12,1060.12) 6485.12,8090.12 6860.12,8465.12 T3.3@7635.12,8465.12
  other v1: 6485.12,2044.37 6485.12,3028.62 6485.12,4012.87 6485.12,4997.13 6485.12,5981.38 6485.12,6965.63 6485.12,7949.88
NetR1_2: R1.2 T1.2 | length 332.8
  Top Layer w30: T1.2@5635.12,8515.12 5685.12,8515.12 R1.2@5885.12,8315.12
NetR2_2: R2.2 T2.2 | length 332.8
  Top Layer w30: T2.2@6635.12,8515.12 6685.12,8515.12 R2.2@6885.12,8315.12
NetR3_2: R3.2 T3.2 | length 332.8
  Top Layer w30: T3.2@7635.12,8515.12 7685.12,8515.12 R3.2@7885.12,8315.12
RED: P1.2 R1.1 | length 1124.5
  Top Layer w30: P1.2@4785.12,8565.12 4790.71,8565.12 4845.24,8619.65 5880.59,8619.65 R1.1@5885.12,8615.12
SCLK: 1.25 2.25 3.25 4.25 P1.8 | length 11779.4
  Top Layer w20: v2(8535.12,1635.12) 4.25@8635.12,1635.12 ; v2(8535.12,3600.12) 3.25@8635.12,3600.12 ; v2(8535.12,5570.12) 2.25@8635.12,5570.12 ; v2(8535.12,7540.12) 1.25@8635.12,7540.12
  Bottom Layer w20: P1.8@4185.12,8565.12 4365.12,8745.12 8270.27,8745.12 8510.12,8505.27 8510.12,8505.12 8535.12,8480.12 v2(8535.12,1635.12)
SIN: 1.26 P1.9 | length 5565.5
  Bottom Layer w20: P1.9@4085.12,8565.12 4295.12,8775.12 8282.69,8775.12 8585.12,8472.69 8585.12,7690.12 1.26@8635.12,7640.12
VCC: 1.21 2.21 3.21 4.21 C2.1 C3.1 C4.1 C5.1 C6.1 P1.1 P1.11 P1.12 P1.13 P1.14 P1.15 R8.1 T1.1 T2.1 T3.1 | length 13088.1
  Top Layer w30: P1.1@4880.12,8565.12 P1.1@4885.12,8565.12 ; 5570.12,8565.12 5572.68,8562.56 5906.89,8562.56 ; 6547.68,8562.56 6957.56,8562.56 ; 7572.56,8565.12 7725.12,8565.12 7730.12,8560.12
  Top Layer w50: P1.15@4485.12,8465.12 P1.14@4585.12,8465.12 P1.13@4685.12,8465.12 P1.12@4785.12,8465.12 P1.11@4885.12,8465.12 P1.1@4885.12,8565.12 5570.12,8565.12 ; C6.1@5288.54,8465.12 5288.54,8563.54 ; 5926.12,8562.56 6547.68,8562.56 ; 6957.56,8562.56 7572.56,8562.56 ; 7730.12,8560.12 7790.12,8560.12 C2.1@8335.12,8015.12 v1(8735.12,8015.12) ; C5.1@8335.12,2110.12 v1(8735.12,2110.12) ; C4.1@8335.12,4074.12 v1(8735.12,4074.12) ; C3.1@8335.12,6045.12 v1(8735.12,6045.12) ; 4.21@8635.12,1235.12 v1(8735.12,1235.12) ; 3.21@8635.12,3200.12 v1(8735.12,3200.12) ; 2.21@8635.12,5170.12 v1(8735.12,5170.12) ; 1.21@8635.12,7140.12 v1(8735.12,7140.12)
  Bottom Layer w30: v1(8735.12,6045.12) v1@8735.12,6050.12
  Bottom Layer w50: v1(8735.12,1235.12) v1(8735.12,2110.12) v1(8735.12,3200.12) v1(8735.12,4074.12) v1(8735.12,5170.12) v1(8735.12,6045.12) ; v1@8735.12,6050.12 8735.12,6910.19 ; v1@8735.12,7145.12 8735.12,6910.19 ; 8735.12,7165.12 v1(8735.12,8015.12) ; R8.1@8800.12,6910.19 8735.12,6910.19
VPRG: 1.27 2.27 3.27 4.27 P1.10 | length 11741
  Bottom Layer w20: P1.10@3985.12,8565.12 4225.12,8805.12 8295.12,8805.12 8685.12,8415.12 8685.12,5770.12 ; 4.27@8635.12,1835.12 8685.12,1835.12 8685.12,3800.12 ; 3.27@8635.12,3800.12 8685.12,3800.12 ; 2.27@8635.12,5770.12 8685.12,5770.12 ; 1.27@8635.12,7740.12 8685.12,7740.12 ; 8685.12,3800.12 8685.12,5770.12
XLAT: 1.24 2.24 3.24 4.24 P1.7 | length 11970.2
  Top Layer w20: P1.7@4285.12,8565.12 4525.12,8805.12 8145.12,8805.12 v2(8485.12,8465.12) ; v2(8485.12,1535.12) 4.24@8635.12,1535.12 ; v2(8485.12,3500.12) 3.24@8635.12,3500.12 ; v2(8485.12,5470.12) 2.24@8635.12,5470.12 ; v2(8485.12,7440.12) 1.24@8635.12,7440.12
  Bottom Layer w20: v2(8485.12,1535.12) v2(8485.12,8465.12)
pads on no net: 1.16 2.16 3.16 4.16 4.17

## Keep-outs
Keep-Out Layer:
  the board outline again, w10

## Silkscreen, mask and mechanical layers (free items; w line width, h text height)
Top Overlay:
  lines w11.81: 7815.12,789.12 7815.12,854.12 ; 7775.12,788.12 7890.12,788.12 7890.12,854.12 7775.12,854.12 7775.12,788.12
  text "Chronome V2.2 by Owen Vallis 2011" at 750,8550 h60
  text "GND" at 3760.12,8435.12 h50
  text "+" at 5360,8435 h60
  text "1" at 305,4860 h50 r270
  text "ADC" at 4435,165 h50
  text "GND" at 4435,60 h50

## Text inside footprints (layer, text, board x,y; h text height)
P1: Top Overlay "VPRG" at 3720.12,8545.12 h50
P4: Top Overlay "1" at 4390,165 h50
T1: Top Overlay "1" at 5535,8545 h59.05
T2: Top Overlay "1" at 6530,8540 h59.05
T3: Top Overlay "1" at 7535,8540 h59.05